# Altium PCB ElvipPCB.PcbDoc (part 1 of 3)
Units mm, origin at the board's own origin, x right, y up, seen from the top; angles counter-clockwise.
Board outline 279.53 x 216.03 mm, 2 copper layers (Top Layer, Bottom Layer), stack 2.071 mm thick; 97 components, 303 nets, 932 pads, 720 vias.
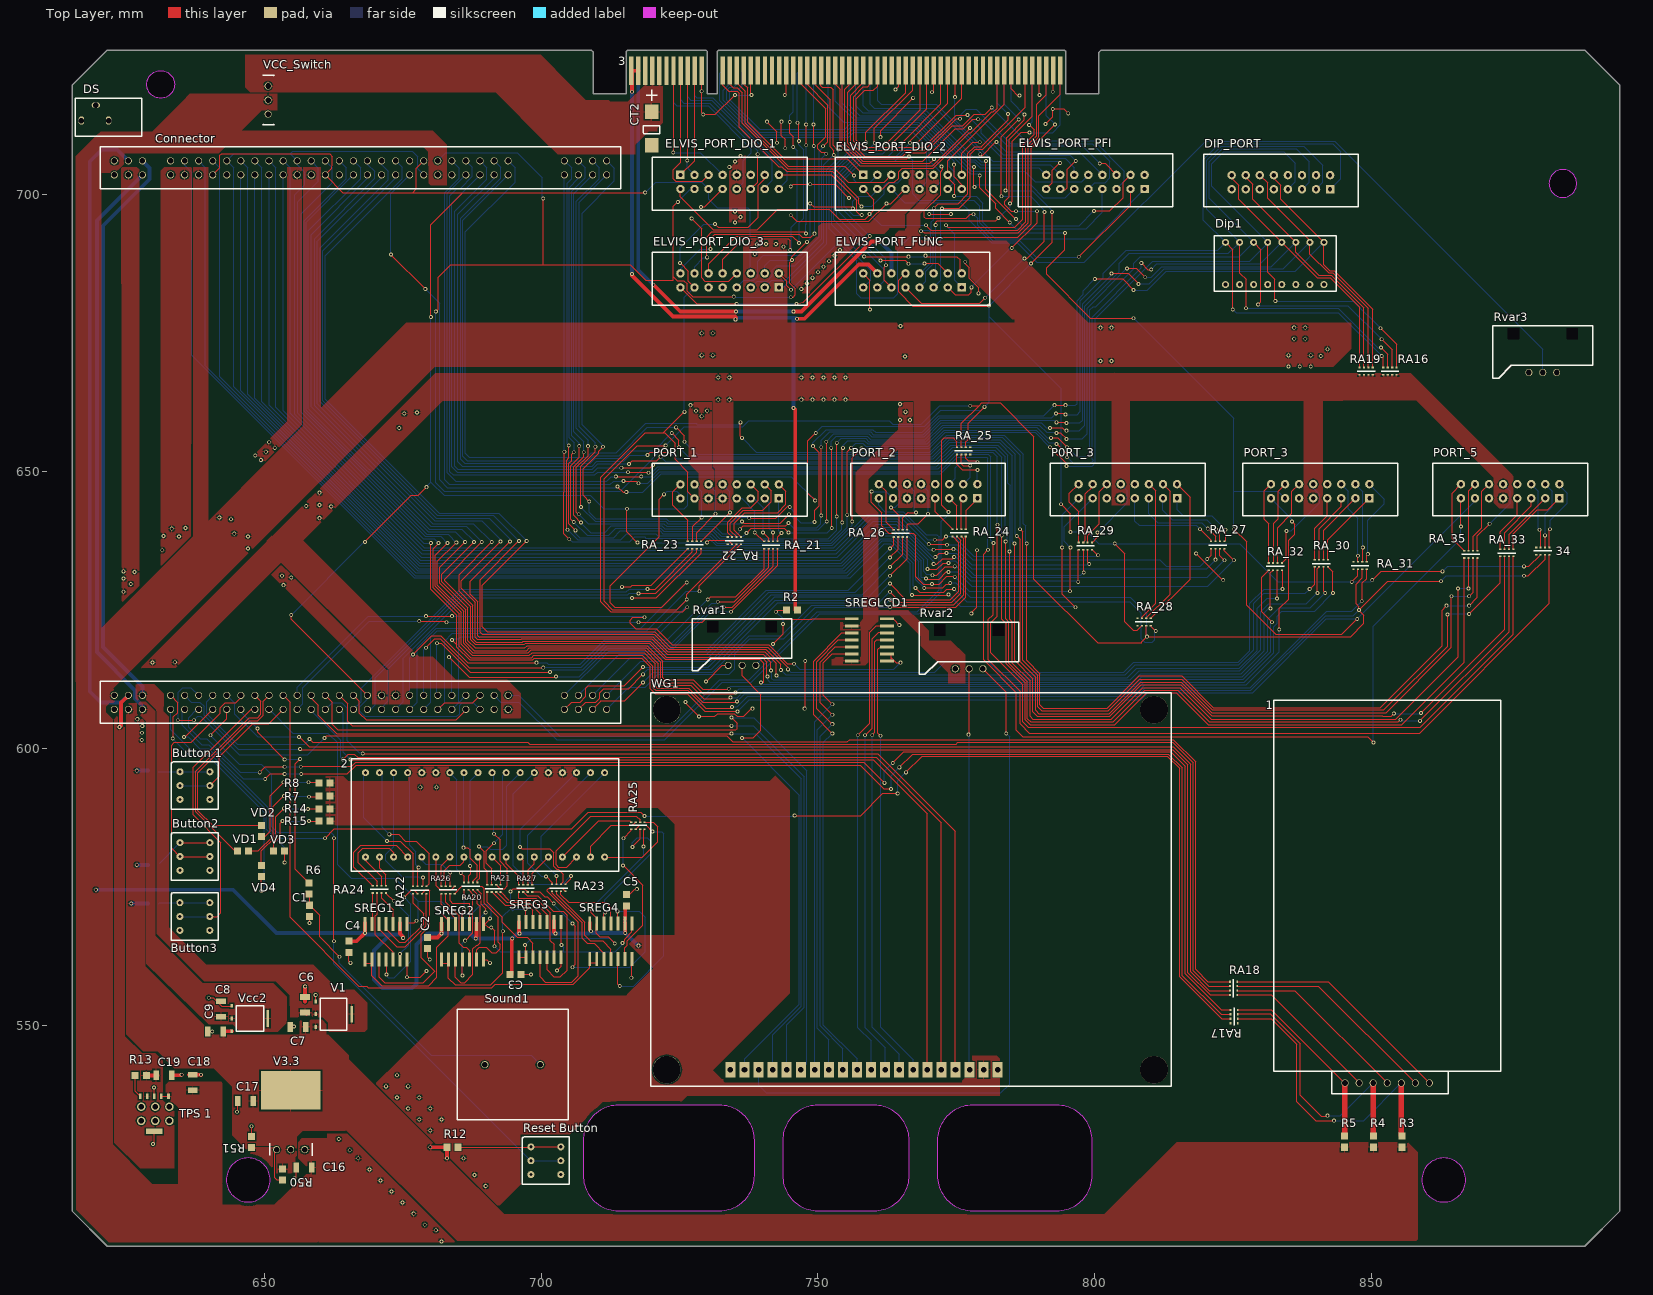
[diagram p0: Top Layer view]
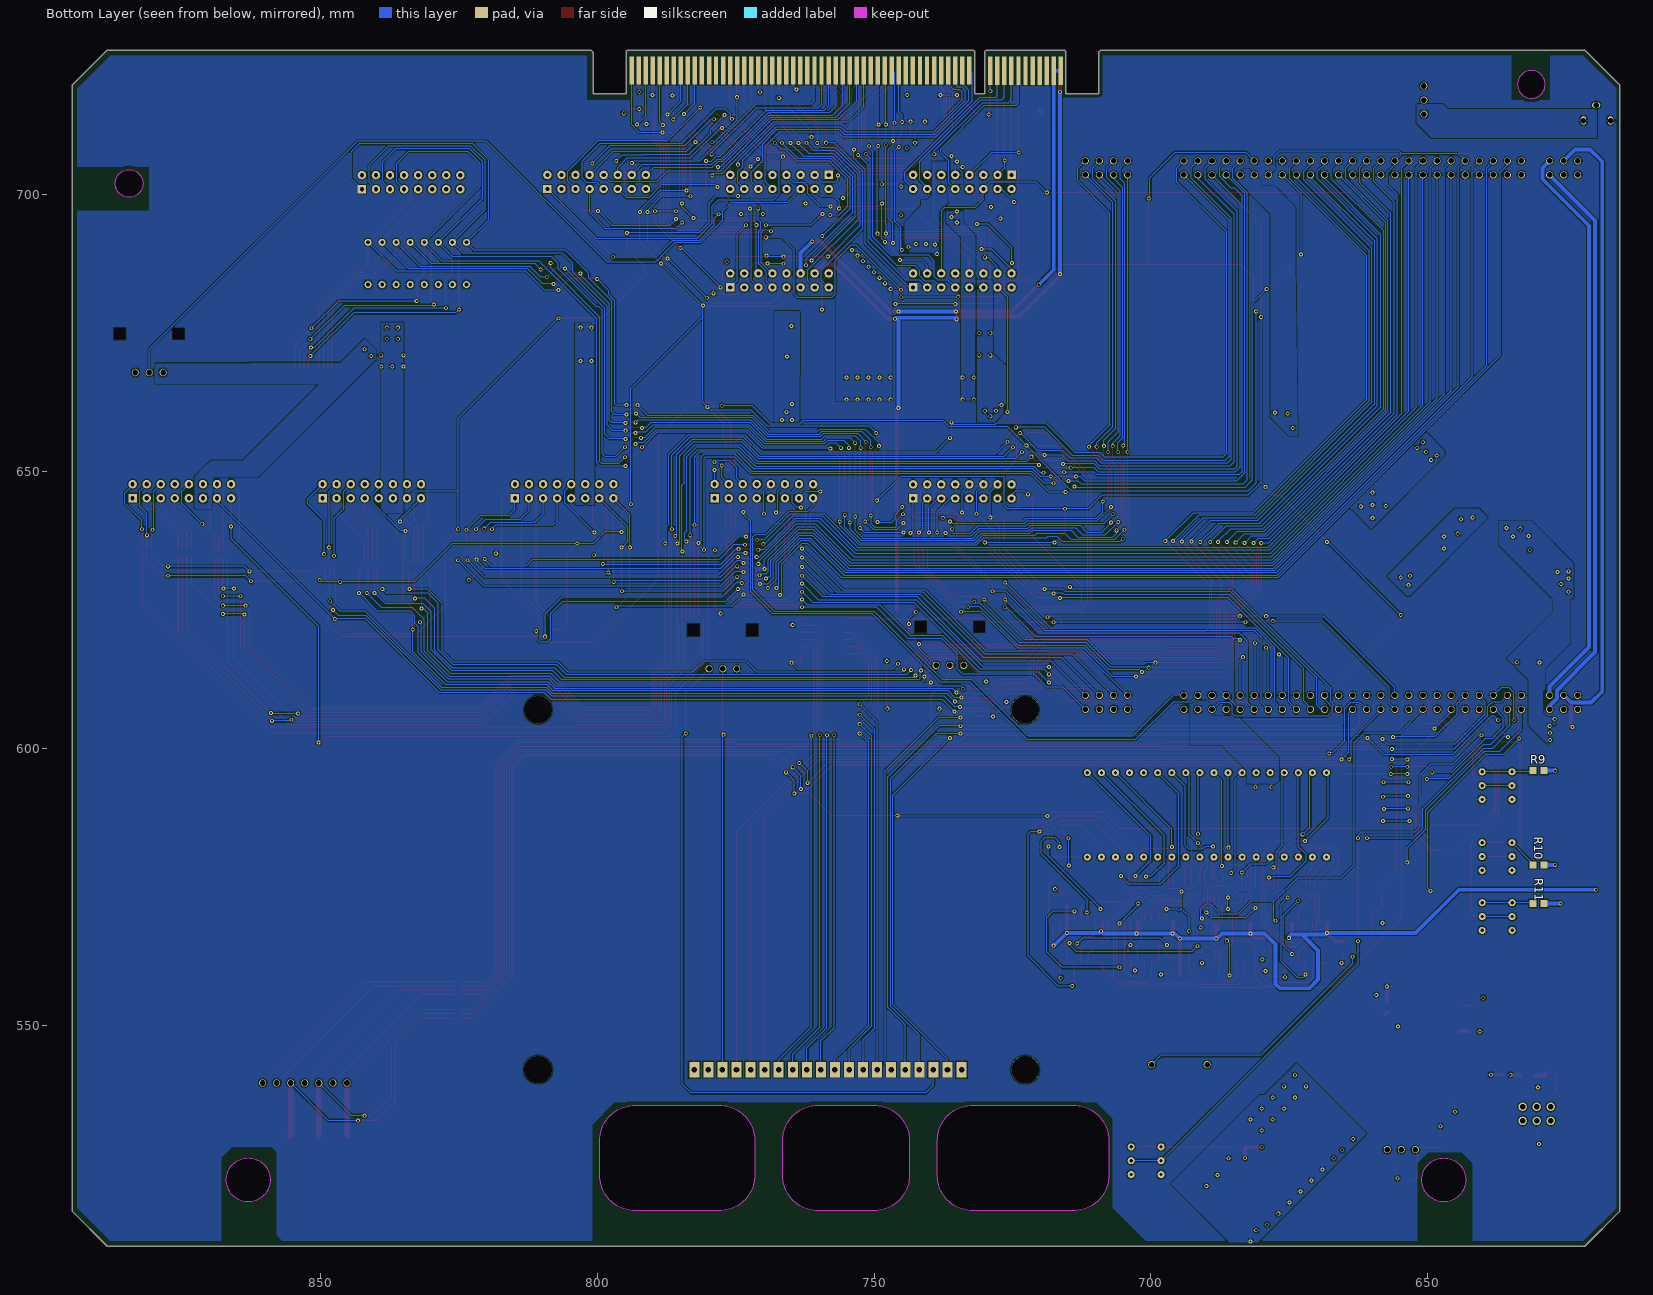
[diagram p1: Bottom Layer view, seen from below]

## Layer stack, top to bottom
Top Solder: solder mask 0.0102, Solder Resist, Dk 3.5
Top Layer: signal copper 0.0356
Dielectric1: core 2, FR-4, Dk 4.8
Bottom Layer: signal copper 0.0356
Bottom Solder: solder mask 0.0102, Solder Resist, Dk 3.5

## Board outline
615.322,516.475 cw(c615.367,516.52) 615.303,516.52 615.303,719.72 cw(c615.367,719.72) 615.322,719.765 621.672,726.115 cw(c621.717,726.07) 621.717,726.134 709.03,726.134 cw(c709.03,726.07) 709.075,726.115 709.393,725.798 cw(c709.347,725.753) 709.411,725.753 709.411,718.264 715.384,718.264 715.384,725.8 cw(c715.447,725.8) 715.402,725.845 715.672,726.115 cw(c715.717,726.07) 715.717,726.134 729.717,726.134 cw(c729.717,726.07) 729.763,726.115 730.033,725.845 cw(c729.987,725.8) 730.051,725.8 730.051,718.264 731.824,718.264 731.824,725.857 cw(c731.887,725.857) 731.842,725.903 732.055,726.115 cw(c732.1,726.07) 732.1,726.134 794.5,726.134 cw(c794.5,726.07) 794.545,726.115 794.733,725.928 cw(c794.687,725.883) 794.751,725.883 794.751,718.264 800.724,718.264 800.724,725.687 cw(c800.787,725.687) 800.742,725.733 801.125,726.115 cw(c801.17,726.07) 801.17,726.134 888.418,726.134 cw(c888.418,726.07) 888.463,726.115 894.813,719.765 cw(c894.768,719.72) 894.831,719.72 894.831,516.52 cw(c894.768,516.52) 894.813,516.475 888.463,510.125 cw(c888.418,510.17) 888.418,510.106 621.717,510.106 cw(c621.717,510.17) 621.672,510.125
cut-out: 631.308,717.426 cw(c631.308,719.926) 628.808,719.926 cw(c631.308,719.926) 631.308,722.426 cw(c631.308,719.926) 633.808,719.926 cw(c631.308,719.926)
cut-out: 882.015,702.037 ccw(c884.515,702.037) 884.515,699.537 ccw(c884.515,702.037) 887.015,702.037 ccw(c884.515,702.037) 884.515,704.537 ccw(c884.515,702.037)
cut-out: 713.965,516.537 732.205,516.537 ccw(c732.205,522.887) 738.555,522.887 738.555,529.237 ccw(c732.205,529.237) 732.205,535.587 713.965,535.587 ccw(c713.965,529.237) 707.615,529.237 707.615,522.887 ccw(c713.965,522.887)
cut-out: 743.635,522.887 ccw(c749.985,522.887) 749.985,516.537 760.145,516.537 ccw(c760.145,522.887) 766.495,522.887 766.495,529.237 ccw(c760.145,529.237) 760.145,535.587 749.985,535.587 ccw(c749.985,529.237) 743.635,529.237
cut-out: 771.575,522.887 ccw(c777.925,522.887) 777.925,516.537 793.165,516.537 ccw(c793.165,522.887) 799.515,522.887 799.515,529.237 ccw(c793.165,529.237) 793.165,535.587 777.925,535.587 ccw(c777.925,529.237) 771.575,529.237
cut-out: 859.055,522.097 ccw(c863.015,522.097) 863.015,518.137 ccw(c863.015,522.097) 866.975,522.097 ccw(c863.015,522.097) 863.015,526.057 ccw(c863.015,522.097)
cut-out: 643.155,522.097 ccw(c647.115,522.097) 647.115,518.137 ccw(c647.115,522.097) 651.075,522.097 ccw(c647.115,522.097) 647.115,526.057 ccw(c647.115,522.097)

## Design rules (kind name [scope] priority, off if disabled: settings)
BoardOutlineClearance [All] p1: gap=0.7 ignorepadtopadclearanceinfootprint=FALSE
Clearance [All] p1: gap=0.2 ignorepadtopadclearanceinfootprint=FALSE except(0: Arc-Hole Track-Hole SMDPad-Hole THPad-Hole Via-Hole Fill-Hole Poly-Hole Region-Hole Text-Hole)
ComponentClearance ComponentClearance_1 [HasFootprint('Connect') vs InComponent('Connector')] p1: gap=0 collisioncheckmode=3 verticalgap=0 showdistances=FALSE
ComponentClearance [All] p2: gap=0.254 collisioncheckmode=3 verticalgap=0.254 showdistances=FALSE
HoleSize [All] p1: absolutevalues=TRUE maxlimit=5.1 minlimit=0.3 maxpercent=80.000 minpercent=20.000
MinimumSolderMaskSliver [All] p1: minsoldermaskwidth=0.15
PasteMaskExpansion [All] p1: expansion=0.2
PlaneClearance [All] p1: clearance=0.2
PolygonConnect [All] p1: connectstyle=Relief reliefconductorwidth=0.254 reliefentries=4 polygonreliefangle="90 Angle" airgapwidth=0.254
RoomDefinition MainConnector [InComponentClass('MainConnector')] p1: confinementstyle=ConfineOut formatcopy=TRUE lockcomponents=FALSE outline 756.2,860.3 851.45,860.3 851.45,968.25 756.2,968.25
RoomDefinition 7SEG-2 [InComponentClass('7SEG-2')] p2: confinementstyle=ConfineOut formatcopy=TRUE lockcomponents=FALSE outline 1023.2,518 1074,518 1074,543.4 1023.2,543.4
RoomDefinition "Power Supplies" [InComponentClass('Power Supplies')] p3: confinementstyle=ConfineOut formatcopy=TRUE lockcomponents=FALSE outline 696.135,852.17 788.035,852.17 788.035,862.97 696.135,862.97
RoomDefinition ELVIS [InComponentClass('ELVIS')] p4: confinementstyle=ConfineOut formatcopy=TRUE lockcomponents=FALSE outline 739.4,878.9 800.2,878.9 800.2,958.1 739.4,958.1
RoomDefinition ELSE_Perif [InComponentClass('ELSE_Perif')] p5: confinementstyle=ConfineOut formatcopy=TRUE lockcomponents=FALSE outline 506.095,826.77 847.09,826.77 847.09,1054.755 506.095,1054.755
RoomDefinition Ports_2 [InComponentClass('Ports_2')] p6: confinementstyle=ConfineOut formatcopy=TRUE lockcomponents=FALSE outline 426,839.001 1320.398,839.001 1320.398,1489.2 426,1489.2
RoutingVias [All] p1: holewidth=0.4 width=0.7 viastyle="Through Hole" minholewidth=0.4 minwidth=0.7 maxholewidth=0.4 maxwidth=0.7
SilkToSolderMaskClearance SilkscreenOverComponentPads [IsPad] p1: minsilkscreentomaskgap=0.254 clearancetoexposedcopper=TRUE
SolderMaskExpansion [All] p1: expansion=0.2
Width Width_1 [InNet('VCC5')] p1: maxlimit=1 minlimit=0.2 preferedwidth=0.7
Width [All] p2: maxlimit=1 minlimit=0.2 preferedwidth=0.7
24 further rules are at their usual default settings.

## Classes and differential pairs
component class 7SEG-2: 2 C2 C3 C4 C5 RA20 RA21 RA22 RA23 RA24 RA25 RA26 RA27 SREG1 SREG2 SREG3 SREG4
component class ELSE_Perif: 1 Button2 Button3 "Button 1" C1 Dip1 DIP_PORT R2 R3 R4 R5 R6 R7 R8 R9 R10 R11 R12 R14 R15 RA16 RA17 RA18 RA19 "Reset Button" Rvar1 Rvar2 Rvar3 Sound1 SREGLCD1 VD1 VD2 VD3 VD4 WG1
component class ELVIS: 3 CT2 ELVIS_PORT_DIO_1 ELVIS_PORT_DIO_2 ELVIS_PORT_DIO_3 ELVIS_PORT_FUNC ELVIS_PORT_PFI VCC_Switch
component class "Power Supplies": C6 C7 C8 C9 C16 C17 C18 C19 DS R13 R50 R51 "TPS 1" V1 V3.3 Vcc2
component class Ports_2: 34 P0RT_3 PORT_1 PORT_2 PORT_3 PORT_5 RA_21 RA_22 RA_23 RA_24 RA_25 RA_26 RA_27 RA_28 RA_29 RA_30 RA_31 RA_32 RA_33 RA_35
component class MainConnector: Connector

## Components (designator, comment, footprint, x,y, rotation, side; value= is the part's Value field where it differs from the comment)
1 "AK-207" AK-207 852.8,577.7 r0 top
2 "CA56-11EWA" CA56-11EWA 668.3,580.4 r0 top
3 "PCI" PCI-120 716.3,722.6 r0 top
34 "Bourns CAT16-102J4LF_1" CAT16-102J4LF_2 880.9,636.3 r0 top
Button2 "ps850l" ps850l 637.5,580.5 r90 top
Button3 "ps850l" ps850l 637.48,569.66 r90 top
"Button 1" "ps850l" ps850l 637.5,593.3 r90 top
C1 "CAPACITY" R0805 658.2,569.7 r90 top
C2 "CAPACITY" R0805 679.5,563.9 r90 top
C3 "CAPACITY" R0805 696.4,559.2 r180 top
C4 "CAPACITY" R0805 665.3,563.2 r90 top
C5 "CAPACITY" R0805 715.4,573.6 r270 top
C6 "CAPACITY" 1206 657.4,552.33 r90 top
C7 "CAPACITY" 1206 657.5,549.73 r180 top
C8 "CAPACITY" 1206 642.233,551.587 r90 top
C9 "CAPACITY" 1206 642.62,548.9 r180 top
C16 "CAPACITY" 1206 658.56,524.32 r180 top
C17 "CAPACITY" 1206 648.01,536.36 r180 top
C18 "CAPACITY" 1206 637.1,538.3 r90 top
C19 "CAPACITY" 1206 633.3,541 r180 top
Connector "Connector" Connect 711.835,706.12 r0 top
CT2 "TECAP, 100 мкФ" "tantal cap" 719.97,708.96 r0 top
Dip1 "DIP" SWD1-8 823.6,687.6 r0 top
DIP_PORT "Вилка_16" DS1013-16 833.6,701 r180 top
DS "DS-313a" ds-313 627.9,713.4 r180 top
ELVIS_PORT_DIO_1 "Вилка_16" DS1013-16 734.06,703.58 r0 top
ELVIS_PORT_DIO_2 "Вилка_16" DS1013-16 767.08,703.58 r0 top
ELVIS_PORT_DIO_3 "Вилка_16" DS1013-16 734.06,683.26 r180 top
ELVIS_PORT_FUNC "Вилка_16" DS1013-16 767.08,683.26 r180 top
ELVIS_PORT_PFI "Вилка_16" DS1013-16 800.1,701.04 r180 top
P0RT_3 "Вилка_16" DS1013-16 805.96,645.2 r180 top
PORT_1 "Вилка_16" DS1013-16 734.06,645.16 r180 top
PORT_2 "Вилка_16" DS1013-16 769.9,645.2 r180 top
PORT_3 "Вилка_16" DS1013-16 840.7,645.2 r180 top
PORT_5 "Вилка_16" DS1013-16 875,645.2 r180 top
R2 "R0805" R0805 744.3,625 r0 top
R3 "R0805" R0805 855.5,528 r90 top
R4 "R0805" R0805 850.3,528 r90 top
R5 "R0805" R0805 845.1,528 r90 top
R6 "R0805" R0805 658.1,575.7 r270 top
R7 "R0805" R0805 659.9,591.4 r0 top
R8 "R0805" R0805 659.9,593.8 r0 top
R9 "R0805" R0805 629,596 r0 bottom
R10 "R0805" R0805 629,579 r0 bottom
R11 "R0805" R0805 629,572 r0 bottom
R12 "R0805" R0805 683,528 r0 top
R13 "R0805" R0805 628.71,540.96 r180 top
R14 "R0805" R0805 659.912,589.116 r0 top
R15 "R0805" R0805 659.9,586.9 r0 top
R50 "R0805" R0805 653.34,522.09 r90 top
R51 "R0805" R0805 647.74,529.95 r270 top
RA16 "Bourns CAT16-102J4LF_1" CAT16-102J4LF_2 853.3,667.5 r180 top
RA17 "Bourns CAT16-102J4LF_1" CAT16-102J4LF_2 825.8,551.6 r270 top
RA18 "Bourns CAT16-102J4LF" CAT16-102J4LF 824.4,556.7 r90 top
RA19 "Bourns CAT16-102J4LF_1" CAT16-102J4LF_2 849,667.5 r180 top
RA20 "Bourns CAT16-102J4LF_1" CAT16-102J4LF_2 687.3,574.5 r180 top
RA21 "Bourns CAT16-102J4LF_1" CAT16-102J4LF_2 691.5,574.1 r180 top
RA22 "Bourns CAT16-102J4LF_1" CAT16-102J4LF_2 678.1,573.8 r180 top
RA23 "Bourns CAT16-102J4LF_1" CAT16-102J4LF_2 703.2,574.2 r180 top
RA24 "Bourns CAT16-102J4LF_1" CAT16-102J4LF_2 670.8,575.2 r0 top
RA25 "Bourns CAT16-102J4LF_1" CAT16-102J4LF_2 717.5,586.7 r0 top
RA26 "Bourns CAT16-102J4LF_1" CAT16-102J4LF_2 683.2,575.1 r0 top
RA27 "Bourns CAT16-102J4LF_1" CAT16-102J4LF_2 697.2,575.4 r0 top
RA_21 "Bourns CAT16-102J4LF_1" CAT16-102J4LF_2 741.5,636.1 r180 top
RA_22 "Bourns CAT16-102J4LF_1" CAT16-102J4LF_2 734.9,636.9 r180 top
RA_23 "Bourns CAT16-102J4LF_1" CAT16-102J4LF_2 727.7,637.4 r0 top
RA_24 "Bourns CAT16-102J4LF_1" CAT16-102J4LF_2 775.5,639.6 r0 top
RA_25 "Bourns CAT16-102J4LF_1" CAT16-102J4LF_2 776.3,654.4 r0 top
RA_26 "Bourns CAT16-102J4LF_1" CAT16-102J4LF_2 764.9,639.5 r0 top
RA_27 "Bourns CAT16-102J4LF_1" CAT16-102J4LF_2 822.2,636.1 r180 top
RA_28 "Bourns CAT16-102J4LF_1" CAT16-102J4LF_2 808.9,623.5 r0 top
RA_29 "Bourns CAT16-102J4LF_1" CAT16-102J4LF_2 798.3,637.2 r0 top
RA_30 "Bourns CAT16-102J4LF_1" CAT16-102J4LF_2 840.9,632.8 r180 top
RA_31 "Bourns CAT16-102J4LF_1" CAT16-102J4LF_2 847.9,632.4 r180 top
RA_32 "Bourns CAT16-102J4LF_1" CAT16-102J4LF_2 832.6,633.5 r0 top
RA_33 "Bourns CAT16-102J4LF_1" CAT16-102J4LF_2 874.4,634.7 r180 top
RA_35 "Bourns CAT16-102J4LF_1" CAT16-102J4LF_2 867.9,635.7 r0 top
"Reset Button" "ps850l" ps850l 700.87,525.57 r90 top
Rvar1 "R-0904N-A10K, L20KC" "R-0904N-A10K, L20KC" 736.3,615 r0 top
Rvar2 "R-0904N-A10K, L20KC" "R-0904N-A10K, L20KC" 777.3,614.4 r0 top
Rvar3 "R-0904N-A10K, L20KC" "R-0904N-A10K, L20KC" 880.9,667.9 r0 top
Sound1 "SCS-17-P10" SCS-17-P10 689.87,542.93 r0 top
SREG1 "M74HC595B1R" SN74HC164DRX 668.2,561.2 r0 top
SREG2 "M74HC595B1R" SN74HC164DRX 682,561.2 r0 top
SREG3 "M74HC595B1R" SN74HC164DRX 696,561.6 r0 top
SREG4 "M74HC595B1R" SN74HC164DRX 708.8,561.3 r0 top
SREGLCD1 "M74HC595B1R" SN74HC164DRX 763.2,615.8 r90 top
"TPS 1" "TPS72515DCQ -1v" SOT223-5 632.7,537.2 r180 top
V1 "IRU1010-18" IRU1010-18 659.3,552.03 r270 top
V3.3 "LM1085" LM1085 652.25,527.58 r0 top
Vcc2 "ADP3338AKCZ-2.5RL7" sot223 644.16,551.24 r270 top
VCC_Switch "switch" К(Р)142ЕН5В 650.7,717.1 r270 top
VD1 "R0805" R0805 645.2,581.5 r0 top
VD2 "R0805" R0805 649.5,586.1 r270 top
VD3 "R0805" R0805 653.7,581.5 r180 top
VD4 "R0805" R0805 649.5,576.9 r90 top
WG1 "MT6464b" WG12864A 722.7,542 r0 top

## Footprints (in the part's own frame and the unit in brackets; to place one, negate y for a bottom-side part, rotate by r counter-clockwise, add the part's x,y. Pads: shape width x height; smd on the part's side, far side on the other; paste and mask are expansions set on the pad)
1206 [mm]
  rect 1x1.8 smd mask+0.05: 1(0,0) 2(2.8,0)
AK-207 [mm]
  round 1.27 / inner round 1.524 / far side round 1.27 hole 1: 1(-7.62,-38.1) 2(-5.08,-38.1) 3(-2.54,-38.1) 4(0,-38.1) 5(2.54,-38.1) 6(5.08,-38.1) 7(7.62,-38.1)
  silkscreen extent -20.5,-40 20.5,31
CA56-11EWA [mm]
  round 1.27 / inner rect 0.8x2.54 / far side round 1.27 hole 0.6: 1(0,0) 2(2.54,0) 3(5.08,0) 4(7.62,0) 5(10.16,0) 6(12.7,0) 7(15.24,0) 8(17.78,0) 9(20.32,0) 10(22.86,0) 11(25.4,0) 12(27.94,0) 13(30.48,0) 14(33.02,0) 15(35.56,0) 16(38.1,0) 17(40.64,0) 18(43.18,0) 19(43.18,15.24) 20(40.64,15.24) 21(38.1,15.24) 22(35.56,15.24) 23(33.02,15.24) 24(30.48,15.24) 25(27.94,15.24) 26(25.4,15.24) 27(22.86,15.24) 28(20.32,15.24) 29(17.78,15.24) 30(15.24,15.24) 31(12.7,15.24) 32(10.16,15.24) 33(7.62,15.24) 34(5.08,15.24) 35(2.54,15.24) 36(0,15.24)
  silkscreen extent -2.54,-2.54 45.72,17.78
CAT16-102J4LF [mm]
  rect 0.4x0.3 smd mask+0.05: 0(-1.2,-1.3) 1(-0.4,-1.3) 2(0.4,-1.3) 3(1.2,-1.3) 4(-1.2,0) 5(-0.4,0) 6(0.4,0) 7(1.2,0)
  silkscreen extent -1.6,-0.6 1.6,-0.6
CAT16-102J4LF_2 [mm]
  rect 0.4x0.3 smd mask+0.05: 0(1.2,-1.3) 1(0.4,-1.3) 2(-0.4,-1.3) 3(-1.2,-1.3) 4(-1.2,0) 5(-0.4,0) 6(0.4,0) 7(1.2,0)
  silkscreen extent -1.6,-0.6 1.6,-0.6
Connect [mm]
  round 1.27 / inner rect 0.8x2.54 / far side round 1.27 hole 1: 1(-88.9,0) 2(-86.36,0) 3(-83.82,0) 4(-78.74,0) 5(-76.2,0) 6(-73.66,0) 7(-71.12,0) 8(-68.58,0) 9(-66.04,0) 10(-63.5,0) 11(-60.96,0) 12(-58.42,0) 13(-55.88,0) 14(-53.34,0) 15(-50.8,0) 16(-48.26,0) 17(-45.72,0) 18(-43.18,0) 19(-40.64,0) 20(-38.1,0) 21(-35.56,0) 22(-33.02,0) 23(-30.48,0) 24(-27.94,0) 25(-25.4,0) 26(-22.86,0) 27(-20.32,0) 28(-17.78,0) 29(-7.62,0) 30(-5.08,0) 31(-2.54,0) 32(0,0) 33(0,-2.54) 34(-2.54,-2.54) 35(-5.08,-2.54) 36(-7.62,-2.54) 37(-17.78,-2.54) 38(-20.32,-2.54) 39(-22.86,-2.54) 40(-25.4,-2.54) 41(-27.94,-2.54) 42(-30.48,-2.54) 43(-33.02,-2.54) 44(-35.56,-2.54) 45(-38.1,-2.54) 46(-40.64,-2.54) 47(-43.18,-2.54) 48(-45.72,-2.54) 49(-48.26,-2.54) 50(-50.8,-2.54) 51(-53.34,-2.54) 52(-55.88,-2.54) 53(-58.42,-2.54) 54(-60.96,-2.54) 55(-63.5,-2.54) 56(-66.04,-2.54) 57(-68.58,-2.54) 58(-71.12,-2.54) 59(-73.66,-2.54) 60(-76.2,-2.54) 61(-78.74,-2.54) 62(-83.82,-2.54) 63(-86.36,-2.54) 64(-88.9,-2.54) 65(-88.9,-96.52) 66(-86.36,-96.52) 67(-83.82,-96.52) 68(-78.74,-96.52) 69(-76.2,-96.52) 70(-73.66,-96.52) 71(-71.12,-96.52) 72(-68.58,-96.52) 73(-66.04,-96.52) 74(-63.5,-96.52) 75(-60.96,-96.52) 76(-58.42,-96.52) 77(-55.88,-96.52) 78(-53.34,-96.52) 79(-50.8,-96.52) 80(-48.26,-96.52) 81(-45.72,-96.52) 82(-43.18,-96.52) 83(-40.64,-96.52) 84(-38.1,-96.52) 85(-35.56,-96.52) 86(-33.02,-96.52) 87(-30.48,-96.52) 88(-27.94,-96.52) 89(-25.4,-96.52) 90(-22.86,-96.52) 91(-20.32,-96.52) 92(-17.78,-96.52) 93(-7.62,-96.52) 94(-5.08,-96.52) 95(-2.54,-96.52) 96(0,-96.52) 97(0,-99.06) 98(-2.54,-99.06) 99(-5.08,-99.06) 100(-7.62,-99.06) 101(-17.78,-99.06) 102(-20.32,-99.06) 103(-22.86,-99.06) 104(-25.4,-99.06) 105(-27.94,-99.06) 106(-30.48,-99.06) 107(-33.02,-99.06) 108(-35.56,-99.06) 109(-38.1,-99.06) 110(-40.64,-99.06) 111(-43.18,-99.06) 112(-45.72,-99.06) 113(-48.26,-99.06) 114(-50.8,-99.06) 115(-53.34,-99.06) 116(-55.88,-99.06) 117(-58.42,-99.06) 118(-60.96,-99.06) 119(-63.5,-99.06) 120(-66.04,-99.06) 121(-68.58,-99.06) 122(-71.12,-99.06) 123(-73.66,-99.06) 124(-76.2,-99.06) 125(-78.74,-99.06) 126(-83.82,-99.06) 127(-86.36,-99.06) 128(-88.9,-99.06)
  silkscreen extent -91.44,-101.6 2.54,2.54
DS1013-16 [mil]
  rect 60x60 hole 30: 0(-350,0)
  round 60 hole 30: 1(-250,0) 2(-150,0) 3(-50,0) 4(50,0) 5(150,0) 6(250,0) 7(350,0) 8(350,-100) 9(250,-100) 10(150,-100) 11(50,-100) 12(-50,-100) 13(-150,-100) 14(-250,-100) 15(-350,-100)
  silkscreen extent -550,-250 550,125
ds-313 [mm]
  oval 1x1.5 / inner round 1.524 / far side oval 1x1.5 hole 1: 1(6,0) 2(10.9,0)
  oval 1.5x1 / inner round 1.524 / far side oval 1.5x1 hole 1: 3(8.3,-2.8)
  silkscreen extent 0,-4 12,2.8
IRU1010-18 [mm]
  rect 0.7x0.5 smd mask+0.05: 0(-2.3,0) 1(0,0) 2(2.3,0)
  rect 3x0.5 smd mask+0.05: 3(0,6.5)
  silkscreen extent -2.9,0.8 2.9,5.6
LM1085 [mm]
  round 1.27 / inner oval 0.4x0.3 / far side round 1.27 hole 1 mask+0.05: 0(0,0) 1(2.54,0) 2(5.08,0)
  rect 10.8x7 smd mask+0.05: 1(2.54,10.7)
  silkscreen extent -1.2,-1.1 6.4,1.14
PCI-120 [mm]
  rect 0.8x5.08 smd mask+0.05: 0(0,-0.2) 1(1.27,-0.2) 2(2.54,-0.2) 3(3.81,-0.2) 4(5.08,-0.2) 5(6.35,-0.2) 6(7.62,-0.2) 7(8.89,-0.2) 8(10.16,-0.2) 9(11.43,-0.2) 10(12.7,-0.2) 11(16.52,-0.14) 12(17.79,-0.14) 13(19.06,-0.14) 14(20.33,-0.14) 15(21.6,-0.14) 16(22.87,-0.14) 17(24.14,-0.14) 18(25.41,-0.14) 19(26.68,-0.14) 20(27.95,-0.14) 21(29.22,-0.14) 22(31.76,-0.14) 23(30.49,-0.14) 24(33.03,-0.14) 25(34.3,-0.14) 26(35.57,-0.14) 27(36.84,-0.14) 28(38.11,-0.14) 29(39.38,-0.14) 30(40.65,-0.14) 31(41.92,-0.14) 32(43.19,-0.14) 33(44.46,-0.14) 34(45.73,-0.14) 35(47,-0.14) 36(48.27,-0.14) 37(49.54,-0.14) 38(50.81,-0.14) 39(52.08,-0.14) 40(53.35,-0.14) 41(54.62,-0.14) 42(55.89,-0.14) 43(57.16,-0.14) 44(58.43,-0.14) 45(59.7,-0.14) 46(60.97,-0.14) 47(62.24,-0.14) 48(64.78,-0.14) 49(66.05,-0.14) 50(67.32,-0.14) 51(68.59,-0.14) 52(69.86,-0.14) 53(71.13,-0.14) 54(72.4,-0.14) 55(73.67,-0.14) 56(74.94,-0.14) 57(76.21,-0.14) 58(77.48,-0.14) 118(63.51,-0.14)
  rect 0.8x5.08 smd far side mask+0.05: 59(77.48,-0.14) 60(76.21,-0.14) 61(74.94,-0.14) 62(73.67,-0.14) 63(72.4,-0.14) 64(71.13,-0.14) 65(69.86,-0.14) 66(68.59,-0.14) 67(67.32,-0.14) 68(66.05,-0.14) 69(64.78,-0.14) 70(62.24,-0.14) 71(60.97,-0.14) 72(59.7,-0.14) 73(58.43,-0.14) 74(57.16,-0.14) 75(55.89,-0.14) 76(54.62,-0.14) 77(53.35,-0.14) 78(52.08,-0.14) 79(50.81,-0.14) 80(49.54,-0.14) 81(48.27,-0.14) 82(47,-0.14) 83(45.73,-0.14) 84(44.46,-0.14) 85(43.19,-0.14) 86(41.92,-0.14) 87(40.65,-0.14) 88(39.38,-0.14) 89(38.11,-0.14) 90(36.84,-0.14) 91(35.57,-0.14) 92(34.3,-0.14) 93(33.03,-0.14) 94(31.76,-0.14) 95(30.49,-0.14) 96(29.22,-0.14) 97(27.95,-0.14) 98(26.68,-0.14) 99(25.41,-0.14) 100(24.14,-0.14) 101(22.87,-0.14) 102(21.6,-0.14) 103(20.33,-0.14) 104(19.06,-0.14) 105(17.79,-0.14) 106(16.52,-0.14) 107(12.7,-0.2) 108(11.43,-0.2) 109(10.16,-0.2) 110(8.89,-0.2) 111(7.62,-0.2) 112(6.35,-0.2) 113(5.08,-0.2) 114(3.81,-0.2) 115(2.54,-0.2) 116(1.27,-0.2) 117(0,-0.2) 119(63.5,-0.14)
ps850l [mm]
  round 1.27 / inner round 1.524 / far side round 1.27 hole 0.6: 1(-2.5,2.7) 2(0,2.7) 3(2.5,2.7) 4(-2.5,-2.7) 5(0,-2.7) 6(2.5,-2.7)
  silkscreen extent -4.28,-4.25 4.28,4.25
R0805 [mm]
  rect 1.27x1.27 smd: 1(0,0) 2(2,0)
"R-0904N-A10K, L20KC" [mm]
  round 1.27 hole 1: 0(-2.5,0) 1(0,0) 2(2.5,0)
  round 1.27 hole 2 square: 3(-5.3,7) 4(5.3,7)
  silkscreen extent -9,-1 9,8.4
SCS-17-P10 [mm]
  round 1.27 / inner oval 0.4x0.3 / far side round 1.27 hole 1 mask+0.05: 0(0,0) 1(10,0)
  silkscreen extent -5,-10 15,10
SN74HC164DRX [mm]
  rect 0.51x2.5 smd mask+0.05: 1(0,0.7) 2(1.27,0.7) 3(2.54,0.7) 4(3.81,0.7) 5(5.08,0.7) 6(6.35,0.7) 7(7.62,0.7) 8(7.62,7.1) 9(6.35,7.1) 10(5.08,7.1) 11(3.81,7.1) 12(2.54,7.1) 13(1.27,7.1) 14(0,7.1)
sot223 [mm]
  rect 0.7x0.5 smd mask+0.05: 0(-2.3,0) 1(0,0) 2(2.3,0)
  rect 3x0.5 smd mask+0.05: 3(0,6.5)
  silkscreen extent -2.3,0.8 2.3,5.8
SOT223-5 [mm]
  rect 0.5x1 smd mask+0.05: 0(0,0) 1(1.27,0) 2(2.54,0) 3(3.81,0) 4(5.08,0)
  rect 3x1 smd mask+0.05: 5(2.54,6.35)
SWD1-8 [mm]
  round 1.27 / inner rect 0.8x2.54 / far side round 1.27 hole 0.65: 1(0,3.81) 2(2.54,3.81) 3(5.08,3.81) 4(7.62,3.81) 5(10.16,3.81) 6(12.7,3.81) 7(15.24,3.81) 8(17.78,3.81) 9(17.78,-3.81) 10(15.24,-3.81) 11(12.7,-3.81) 12(10.16,-3.81) 13(7.62,-3.81) 14(5.08,-3.81) 15(2.54,-3.81) 16(0,-3.81)
  silkscreen extent -2,-5 20,5
"tantal cap" [mm]
  rect 2.4x2.6 smd mask+0.05: 0(0,0) 1(0,6)
  silkscreen extent -1.5,2.1 1.5,10
WG12864A [mm]
  rect 1.8x2.75 hole 1 paste+0: 0(59.76,0)
  rect 1.8x2.75 hole 1: 1(57.22,0) 2(54.68,0) 3(52.14,0) 4(49.6,0) 5(47.06,0) 6(44.52,0) 7(41.98,0) 8(39.44,0) 9(36.9,0) 10(34.36,0) 11(31.82,0) 12(29.28,0) 13(26.74,0) 14(24.2,0) 15(21.66,0) 16(19.12,0) 17(16.58,0) 18(14.04,0) 19(11.5,0)
  round 5 hole 5 unplated: hole(0,65) hole4(0,0)
  round 5 hole 5: hole1(88,65) hole2(88,0)
  silkscreen extent -2.9,-3 91.1,68.1
К(Р)142ЕН5В [mm]
  round 1.27 / inner oval 0.4x0.3 / far side round 1.27 hole 1 mask+0.05: 0(-2.54,0) 1(0,0) 2(2.54,0)
  silkscreen extent -4.5,-1 4.5,1.1

## Part data
DIP_PORT ELVIS_PORT_DIO_1 ELVIS_PORT_DIO_2 ELVIS_PORT_DIO_3 ELVIS_PORT_FUNC ELVIS_PORT_PFI P0RT_3 PORT_1 PORT_2 PORT_3 PORT_5: library part DS1013-16, "16_pin"

## Free pads (board coordinates)
  round 1.524 hole 1 mask+0.05: 0(627.8,535.3) 1(630.34,535.3) 2(632.88,535.3) 3(627.8,532.76) 4(630.34,532.76) 5(632.88,532.76)

## Via types
v1: diameter 0.7, hole 0.4, Top Layer to Bottom Layer, 720 vias

## Nets (pads, with @x,y where several pads share a name; then routed paths per layer and width w, separated by ;. In a path a pad name is that pad's centre, name@x,y a point inside that pad or via, vN(x,y) a via of type N, cw(c..) or ccw(c..) an arc to the next point about the centre after c; other vN are vias at no path point)
7SEG_CLK: Connector.118 SREG1.8 SREG2.8 SREG3.8 SREG4.8 | length 117.9
  Top Layer w0.2: SREG1.8@675.82,568.5 677.1,568.5 v1(677.5,568.9) ; SREG2.8@689.62,568.3 689.8,568.3 SREG2.8@689.81,568.31 ; SREG2.8@689.62,568.5 689.72,568.4 SREG2.8@689.81,568.31 ; v1(690.8,569.3) SREG2.8@689.81,568.31 ; v1(691.6,564.3) 691.6,567.1 v1(691,567.7) 690.42,567.7 SREG2.8@689.81,568.31 ; SREG3.8@703.62,568.7 703.62,564.58 v1(703.7,564.5) ; v1(714.7,564.9) 715.1,565.3 715.1,565.6 716.42,566.92 SREG4.8@716.42,568.4
  Bottom Layer w0.2: Connector.118@650.875,607.06 655.135,602.8 661.5,602.8 663.3,601 663.3,579 665.7,576.6 673.6,576.6 677.8,572.4 ; v1(677.5,568.9) 677.8,569.2 677.8,572.4 ; v1(690.8,569.3) 691,569.5 691,571.1 690.2,571.9 689.2,571.9 687.4,570.1 684.3,570.1 682,572.4 677.8,572.4 ; v1(691.6,564.3) 692.6,563.3 704.1,563.3 ; v1(703.7,564.5) 704.1,564.1 704.1,563.3 ; v1(714.7,564.9) 714.7,564.6 713.4,563.3 704.1,563.3
7SEGM_DATA: Connector.76 SREG4.1 SREG4.2 | length 103.7
  Top Layer w0.2: Connector.76@653.415,609.6 654.7,608.315 654.7,569.5 667.1,557.1 668.5,557.1 668.8,556.8 691.1,556.8 691.7,557.4 705.8,557.4 708.8,560.4 708.8,561.3 SREG4.2@710.07,561.3
AI1: Connector.108 PORT_1.7 | length 109.1
  Top Layer w0.2: v1(722.2,645.9) 721.3,645 721.3,638.2 712.5,629.4 712.5,626.3 713.3,625.5 721.8,625.5 v1(726.3,630)
  Bottom Layer w0.2: Connector.108@676.275,607.06 677.6,608.385 677.6,618.2 681.1,621.7 718,621.7 v1(726.3,630) ; v1(722.2,645.9) 722.8,646.5 724.5,646.5 725.17,645.83 PORT_1.7@725.17,645.16
AI2: Connector.92 PORT_2.7 | length 115.9
  Bottom Layer w0.2: Connector.92@694.055,609.6 696,609.6 703.4,602.2 722.1,602.2 732.3,612.4 737.6,612.4 749.9,624.7 767.9,624.7 771.9,628.7 771.9,638.2 771.5,638.6 769.6,638.6 765.4,642.8 762.1,642.8 761.01,643.89 PORT_2.7@761.01,645.2
AI3: Connector.5 P0RT_3.7 | length 244.4
  Top Layer w0.2: v1(767,627.7) 773.5,627.7 v1(773.6,627.8) ; v1(794.1,636.3) 794.1,627.9 v1(796.5,625.5)
  Bottom Layer w0.2: Connector.5@635.635,706.12 635.635,705.365 636.9,704.1 636.9,671 677.1,630.8 755.8,630.8 762,637 763.1,637 766.7,633.4 766.7,628 v1(767,627.7) ; v1(773.6,627.8) 775.7,625.7 796.3,625.7 v1(796.5,625.5) ; v1(794.1,636.3) 794.1,642.23 P0RT_3.7@797.07,645.2
AI4: Connector.16 PORT_3.7 | length 295.8
  Top Layer w0.2: v1(684.7,637.2) 681.3,633.8 681.3,629.5 686,624.8 686,619 687.7,617.3 697.7,617.3 698.2,617.8 718.7,617.8 721.2,615.3 721.2,611.9 721.7,611.4 727,611.4 729.4,609 734,609 v1(734.2,609.2) ; v1(833.3,621.5) 833.3,625.3 835,627 835,637.6 836.1,638.7 836.1,640.5 v1(835.6,641)
  Bottom Layer w0.2: Connector.16@663.575,706.12 664.8,704.895 664.8,702.9 657.2,695.3 657.2,660.9 679.4,638.7 683.2,638.7 v1(684.7,637.2) ; v1(734.2,609.2) 735.4,609.2 736.6,610.4 807.9,610.4 809,611.5 827.3,611.5 833.3,617.5 v1(833.3,621.5) ; PORT_3.7@831.81,645.2 835.6,641.41 v1(835.6,641)
AI5: Connector.44 PORT_5.7 | length 330.8
  Top Layer w0.2: v1(672.9,689.2) v1(679.1,683) ; v1(713.8,647.3) 714.8,646.3 v1(715.4,646.3) ; v1(780.7,635.9) 779.9,635.1 779.9,616 785.8,610.1 785.8,603.3 787,602.1 849.3,602.1 v1(850.3,601.1) ; v1(866.1,640.1) 866.11,640.11 PORT_5.7@866.11,645.2
  Bottom Layer w0.2: v1(672.9,689.2) 672.9,700.205 Connector.44@676.275,703.58 ; v1(679.1,683) 681.7,680.4 681.7,648.5 683.1,647.1 713.6,647.1 v1(713.8,647.3) ; v1(715.4,646.3) 718.4,646.3 721.7,649.6 772.2,649.6 775.2,652.6 780.5,652.6 780.7,652.4 v1(780.7,635.9) ; v1(850.3,601.1) 850.3,622.1 866.1,637.9 v1(866.1,640.1)
AO1: Connector.107 RA_22.4 | length 77.1
  Top Layer w0.2: v1(728.6,628.4) 728.6,629.4 RA_22.4@736.1,636.9
  Bottom Layer w0.2: Connector.107@678.815,607.06 680.1,608.345 680.1,620.1 681.3,621.3 719.1,621.3 726.2,628.4 v1(728.6,628.4)
AO2: Connector.91 RA_25.4 | length 127.7
  Top Layer w0.2: v1(773.6,642.7) 772.4,643.9 772.4,655.7 772.8,656.1 774.4,656.1 775.1,655.4 RA_25.4@775.1,654.4
  Bottom Layer w0.2: Connector.91@691.515,609.6 692.715,608.4 696,608.4 702.8,601.6 722.3,601.6 732.7,612 738,612 750.3,624.3 768.3,624.3 772.3,628.3 772.3,641 773.5,642.2 773.5,642.6 v1(773.6,642.7)
AO3: Connector.6 RA_28.0 | length 243.6
  Top Layer w0.2: v1(767.6,629) 768.4,628.2 772.7,628.2 773.3,628.8 v1(774.6,628.8) ; RA_28.0@810.1,622.2 810.1,622.1 v1(811,621.2)
  Bottom Layer w0.2: Connector.6@638.175,706.12 639.4,704.895 639.4,669.1 677.3,631.2 755.3,631.2 761.6,637.5 763.2,637.5 767.2,633.5 767.2,629.4 v1(767.6,629) ; v1(774.6,628.8) 776.9,626.5 806.3,626.5 808.4,624.4 808.4,619.8 809,619.2 810.4,619.2 810.8,619.6 810.8,621 v1(811,621.2)
AO4: Connector.15 RA_31.4 | length 289
  Top Layer w0.2: v1(683.1,637.1) 680.9,634.9 680.9,629.3 685.6,624.6 685.6,618.8 687.6,616.8 697.9,616.8 698.4,617.3 718.6,617.3 720.6,615.3 720.6,611.3 721,610.9 726.7,610.9 729.2,608.4 735.3,608.4 v1(735.4,608.5) ; v1(848.2,626.6) 848.3,626.7 848.3,629.9 849.1,630.7 RA_31.4@849.1,632.4
  Bottom Layer w0.2: Connector.15@661.035,706.12 662.3,704.855 662.3,702.2 656.7,696.6 656.7,660.7 679.1,638.3 681.9,638.3 v1(683.1,637.1) ; v1(735.4,608.5) 736.8,609.9 808,609.9 809.1,611 828.1,611 841.9,624.8 846.4,624.8 v1(848.2,626.6)
AO5: 34.0 Connector.24 | length 326.8
  Top Layer w0.2: v1(714.9,648.3) 717.2,648.3 v1(717.6,647.9) ; v1(781.7,637.1) 781.7,624.2 780.8,623.3 780.8,616 786.5,610.3 786.5,604.5 788.2,602.8 858.7,602.8 882.1,626.2 34.0@882.1,635
  Bottom Layer w0.2: Connector.24@683.895,706.12 685.2,704.815 685.2,703 682.6,700.4 682.6,648.5 683.4,647.7 712.5,647.7 713.1,648.3 v1(714.9,648.3) ; v1(717.6,647.9) 719.3,647.9 721.4,650 772,650 775.1,653.1 780.8,653.1 781.2,652.7 781.2,637.6 v1(781.7,637.1)
BUTTON_1_OUT: "Button 1.2" "Button 1.5" Connector.117 | length 26.4
  Top Layer w0.2: 640.2,593.3 641.9,595 641.9,598.5 647.9,604.5 650.855,604.5 Connector.117@653.415,607.06
  Bottom Layer w0.2: 634.8,593.3 640.2,593.3
BUTTON_2_OUT: Button2.2 Button2.5 Connector.73 | length 43.2
  Top Layer w0.2: Button2.5@640.2,580.5 Button2.2@634.8,580.5 633.32,581.98 633.32,600.62 633.8,601.1 636.8,601.1 642.1,606.4 642.1,607.4 642.9,608.2 643,608.3 644.9,608.3 645.795,609.195 Connector.73@645.795,609.6
BUTTON_3_OUT: Button3.2 Button3.5 Connector.119 | length 51.5
  Top Layer w0.2: Button3.5@640.18,569.66 641.56,569.66 642.2,570.3 642.2,583 637.2,588 637.2,596.6 647.66,607.06 Connector.119@648.335,607.06
  Bottom Layer w0.2: Button3.2@634.78,569.66 Button3.5@640.18,569.66
BUTTON_RESET_OUT: "Reset Button.2" "Reset Button.5" Connector.121 | length 120.1
  Top Layer w0.2: v1(640.3,602.4) 643.255,605.355 Connector.121@643.255,607.06 ; v1(662.6,565.2) v1(662.6,583.8)
  Bottom Layer w0.2: v1(640.3,602.4) 645.5,597.2 649.5,597.2 651.4,595.3 651.4,585.9 652.4,584.9 662,584.9 662.6,584.3 v1(662.6,583.8) ; v1(662.6,565.2) 662.6,561.14 698.17,525.57 703.57,525.57
DIP_OUT_0: Connector.33 Dip1.1 DIP_PORT.0 RA16.0 | length 323.3
  Top Layer w0.2: v1(707.2,643.6) 707.2,651 709.8,653.6 v1(709.8,654.5) ; v1(736.3,641) 736.6,640.7 743.2,640.7 v1(744.8,642.3) ; v1(750.6,642.1) v1(750.6,654.4) ; v1(793,660.5) 794.5,660.5 v1(794.7,660.3) ; Dip1.1@823.6,691.41 824.9,690.11 v1(824.9,679.3) ; v1(851.8,670.9) 852.1,670.6 RA16.0@852.1,668.8
  Bottom Layer w0.2: v1(707.2,643.6) 709.8,641 722.5,641 722.9,640.6 735.9,640.6 v1(736.3,641) ; v1(709.8,654.5) 709.8,655.2 706.9,658.1 706.9,698.645 Connector.33@711.835,703.58 ; v1(744.8,642.3) 745.9,641.2 745.9,640.2 746.2,639.9 749.8,639.9 750.5,640.6 750.5,642 v1(750.6,642.1) ; v1(750.6,654.4) 750.6,655.7 752.1,657.2 759.5,657.2 760,656.7 769,656.7 772,659.7 792.2,659.7 v1(793,660.5) ; v1(794.7,660.3) 796.8,660.3 797.4,660.9 797.4,680.9 801.5,685 801.5,685.8 805.7,690 822.19,690 Dip1.1@823.6,691.41 819.6,695.41 819.6,706.3 822.5,709.2 843,709.2 844.4,707.8 844.4,702.91 DIP_PORT.0@842.49,701 ; v1(824.9,679.3) 825.5,678.7 844,678.7 v1(851.8,670.9)
DIP_OUT_1: Connector.34 Dip1.2 DIP_PORT.1 RA16.1 | length 324
  Top Layer w0.2: v1(707.2,640.8) 705.9,642.1 705.9,650.9 707.7,652.7 v1(707.7,653.5) ; v1(737.1,638.9) 738,639.8 743.9,639.8 v1(744.7,639) ; v1(752.4,654.3) 752.5,654.2 v1(752.5,639.8) ; v1(791.9,657.9) 794.1,657.9 794.8,657.2 794.9,657.3 v1(794.9,657.4) ; Dip1.2@826.14,691.41 826.14,685.86 827.3,684.7 v1(827.3,679.5) ; v1(851.7,672.4) 852.9,671.2 RA16.1@852.9,668.8
  Bottom Layer w0.2: v1(707.2,640.8) 709,639 711.5,639 712.7,640.2 721.8,640.2 722.3,639.7 731.1,639.7 732.5,638.3 736.5,638.3 v1(737.1,638.9) ; v1(707.7,653.5) 707.7,655.4 705.9,657.2 705.9,700.185 Connector.34@709.295,703.58 ; v1(744.7,639) 751.7,639 v1(752.5,639.8) ; v1(752.4,654.3) 752.4,655.5 753.3,656.4 758.9,656.4 759.5,655.8 769.3,655.8 772.3,658.8 790.3,658.8 791.2,657.9 v1(791.9,657.9) ; v1(794.9,657.4) 797.2,657.4 798.2,658.4 798.2,679.9 804.4,686.1 804.4,687.6 806.2,689.4 824.13,689.4 Dip1.2@826.14,691.41 820.2,697.35 820.2,706.2 822.8,708.8 837.7,708.8 841.2,705.3 841.2,702.25 DIP_PORT.1@839.95,701 ; v1(827.3,679.5) 844,679.5 851.1,672.4 v1(851.7,672.4)
DIP_OUT_2: Connector.35 Dip1.3 DIP_PORT.2 RA16.2 | length 328.5
  Top Layer w0.2: v1(705.9,653.5) 705.5,653.1 705.5,652 705,651.5 705,640.6 v1(706.2,639.4) ; v1(754.4,640.8) 754.4,654.2 v1(754.5,654.3) ; v1(792.1,656.1) 793.3,656.1 v1(795,654.4) ; Dip1.3@828.68,691.41 830,690.09 830,680.7 v1(829.5,680.2) ; v1(851.8,673.9) 853.7,672 RA16.2@853.7,668.8
  Bottom Layer w0.2: v1(705.9,653.5) 706,653.6 706,655.2 705.1,656.1 705.1,701.3 706.755,702.955 Connector.35@706.755,703.58 ; v1(706.2,639.4) 706.2,638.9 707,638.1 713.1,638.1 714.3,639.3 721.5,639.3 722,638.8 730.7,638.8 732,637.5 752.2,637.5 754.3,639.6 754.3,640.7 v1(754.4,640.8) ; v1(754.5,654.3) 754.5,654.7 755.4,655.6 758.4,655.6 759,655 769.7,655 772.7,658 789.5,658 791.4,656.1 v1(792.1,656.1) ; v1(795,654.4) 796.7,652.7 798.5,652.7 799.1,653.3 799.1,679.2 799.7,679.8 800.2,679.8 807,686.6 807,687.6 808.2,688.8 826.07,688.8 Dip1.3@828.68,691.41 820.7,699.39 820.7,706 823,708.3 836.4,708.3 838.7,706 838.7,702.29 DIP_PORT.2@837.41,701 ; v1(829.5,680.2) 829.7,680 845.7,680 v1(851.8,673.9)
DIP_OUT_3: Connector.36 Dip1.4 DIP_PORT.3 RA16.3 | length 325
  Top Layer w0.2: v1(704.2,653.6) 704.2,646.4 704.1,646.3 704.1,638.8 v1(705.1,637.8) ; v1(756.2,641) 756.2,652.5 v1(757.9,654.2) ; v1(791.9,654.4) 794.9,651.4 v1(794.9,651) ; Dip1.4@831.22,691.41 831.22,685.98 832.5,684.7 832.5,680.9 v1(832.6,680.8) ; v1(851.6,675.9) 854.5,673 RA16.3@854.5,668.8
  Bottom Layer w0.2: v1(704.2,653.6) 704.215,653.615 Connector.36@704.215,703.58 ; v1(705.1,637.8) 705.6,637.3 716,637.3 716.9,638.2 718.7,638.2 718.9,638 730.3,638 731.6,636.7 752.6,636.7 756.2,640.3 v1(756.2,641) ; v1(757.9,654.2) 770.1,654.2 773,657.1 789.2,657.1 v1(791.9,654.4) ; v1(794.9,651) 799.5,651 800.1,651.6 800.1,677.6 810.5,688 828,688 831.22,691.22 Dip1.4@831.22,691.41 821.1,701.53 821.1,705.6 823.3,707.8 834.1,707.8 836.2,705.7 836.2,702.33 DIP_PORT.3@834.87,701 ; v1(832.6,680.8) 846.7,680.8 v1(851.6,675.9)
DIP_OUT_4: Connector.29 Dip1.5 DIP_PORT.8 RA19.0 | length 297.6
  Top Layer w0.2: v1(704.8,639.5) 704.6,639.7 704.6,652.1 705,652.5 v1(705,654.7) ; v1(755.3,642.2) 755.3,653.6 v1(756,654.3) ; v1(793.1,655) 795,653.1 v1(795,652.6) ; v1(808.4,687.7) 809.6,686.5 v1(810.2,686.5) ; DIP_PORT.8@824.71,703.54 824.71,702.99 826,701.7 826,699.17 Dip1.5@833.76,691.41 840.17,685 842.5,685 847.8,679.7 RA19.0@847.8,668.8
  Bottom Layer w0.2: Connector.29@704.215,706.12 705.5,704.835 705.5,702.9 704.7,702.1 704.7,655 v1(705,654.7) ; v1(704.8,639.5) 706.6,637.7 714.4,637.7 715.5,638.8 720.7,638.8 721.1,638.4 730.5,638.4 731.8,637.1 752.4,637.1 755.3,640 v1(755.3,642.2) ; v1(756,654.3) 756.8,655.1 758.1,655.1 758.6,654.6 769.9,654.6 772.8,657.5 789.4,657.5 791.7,655.2 792.9,655.2 v1(793.1,655) ; v1(795,652.6) 796.2,651.4 799.1,651.4 799.7,652 799.5,652.2 799.5,677.9 808.4,686.8 v1(808.4,687.7) ; v1(810.2,686.5) 811.2,687.5 829.85,687.5 Dip1.5@833.76,691.41
DIP_OUT_5: Connector.30 Dip1.6 DIP_PORT.9 RA19.1 | length 294.4
  Top Layer w0.2: v1(705.9,640.9) 705.4,641.4 705.4,651.1 706.9,652.6 v1(706.9,654.6) ; v1(753.4,641.9) v1(753.4,655.2) ; v1(793.1,657) 793.8,657 v1(794.9,655.9) ; v1(805.8,686.7) 807.5,686.7 v1(809.1,685.1) ; DIP_PORT.9@827.25,703.54 827.25,703.15 828.5,701.9 828.5,699.21 Dip1.6@836.3,691.41 836.3,689.6 840.4,685.5 842.7,685.5 848.6,679.6 RA19.1@848.6,668.8
  Bottom Layer w0.2: v1(705.9,640.9) 708.3,638.5 712.2,638.5 713.5,639.8 721.6,639.8 722.2,639.2 731,639.2 732.3,637.9 751.9,637.9 753.4,639.4 v1(753.4,641.9) ; Connector.30@706.755,706.12 708,704.875 708,703.1 705.5,700.6 705.5,656.5 706.9,655.1 v1(706.9,654.6) ; v1(753.4,655.2) 754.2,656 758.6,656 759.2,655.4 769.5,655.4 772.5,658.4 790,658.4 791.3,657.1 793,657.1 v1(793.1,657) ; v1(794.9,655.9) 797.7,655.9 798.6,656.8 798.6,679.5 v1(805.8,686.7) ; v1(809.1,685.1) 810.2,685.1 812.1,687 831.89,687 Dip1.6@836.3,691.41
DIP_OUT_6: Connector.31 Dip1.7 DIP_PORT.10 RA19.2 | length 291.3
  Top Layer w0.2: v1(706.8,642.3) 706.4,642.7 706.4,650.8 708.5,652.9 v1(708.5,654.6) ; v1(735.9,639.6) 736.5,640.2 744.2,640.2 v1(744.7,640.7) ; v1(751.5,655.4) 751.6,655.3 v1(751.6,641) ; v1(793.1,658.9) 794.8,658.9 v1(794.9,658.8) ; v1(803,685.8) 806,685.8 v1(807.9,683.9) ; DIP_PORT.10@829.79,703.54 831.2,702.13 831.2,699.4 838.84,691.76 Dip1.7@838.84,691.41 838.84,689.26 842.2,685.9 843,685.9 849.4,679.5 RA19.2@849.4,668.8
  Bottom Layer w0.2: v1(706.8,642.3) 708.5,640.6 722.2,640.6 722.7,640.1 731.4,640.1 732.7,638.8 735.6,638.8 735.9,639.1 v1(735.9,639.6) ; v1(708.5,654.6) 708.5,655.7 706.4,657.8 706.4,698.8 710.5,702.9 710.5,704.915 Connector.31@709.295,706.12 ; v1(744.7,640.7) 745.9,639.5 750.1,639.5 v1(751.6,641) ; v1(751.5,655.4) 752.9,656.8 759.2,656.8 759.7,656.3 769.2,656.3 772.2,659.3 792.7,659.3 v1(793.1,658.9) ; v1(794.9,658.8) 797.3,658.8 797.8,659.3 797.8,680.3 803,685.5 v1(803,685.8) ; v1(807.9,683.9) 809.8,683.9 812.5,686.6 834.03,686.6 Dip1.7@838.84,691.41
DIP_OUT_7: Connector.32 Dip1.8 DIP_PORT.11 RA19.3 | length 293.2
  Top Layer w0.2: v1(708.7,644.6) 707.6,645.7 707.6,650.5 710.4,653.3 710.4,653.7 v1(711.2,654.5) ; v1(737.6,641.6) 742.4,641.6 744.6,643.8 744.8,643.6 v1(744.9,643.6) ; v1(749.1,654.6) 750.1,653.6 750.2,653.5 750.2,643.8 749.4,643 v1(749.4,640.9) ; v1(792.7,662) v1(794.7,662) ; v1(800,684.8) 805,684.8 v1(807,682.8) ; DIP_PORT.11@832.33,703.54 832.33,702.97 833.6,701.7 833.6,699.19 Dip1.8@841.38,691.41 841.38,687.32 842.4,686.3 843.2,686.3 850.2,679.3 RA19.3@850.2,668.8
  Bottom Layer w0.2: v1(708.7,644.6) 708.7,642.7 709.9,641.5 722.6,641.5 723.1,641 734.8,641 735.6,641.8 737.4,641.8 v1(737.6,641.6) ; v1(711.2,654.5) 711.2,654.7 707.4,658.5 707.4,696.7 713.2,702.5 713.2,704.755 Connector.32@711.835,706.12 ; 744.6,643.8 746.2,642.2 746.2,641.5 746.9,640.8 749.3,640.8 v1(749.4,640.9) ; v1@744.8,643.6 v1(744.9,643.6) ; v1(749.1,654.6) 749.1,655.2 751.5,657.6 759.9,657.6 760.4,657.1 768.8,657.1 771.8,660.1 790.8,660.1 v1(792.7,662) ; v1(794.7,662) 796.5,662 796.8,662.3 796.8,680.9 797.9,682 797.9,682.7 v1(800,684.8) ; v1(807,682.8) 809.5,682.8 812.9,686.2 836.17,686.2 Dip1.8@841.38,691.41
DP2: 2.9 RA20.3 | length 4.9
  Top Layer w0.2: RA20.3@688.5,575.8 688.5,576.2 688.9,576.6 688.9,580.12 2.9@688.62,580.4
DUT+: 3.63 ELVIS_PORT_FUNC.0 | length 55.4
  Top Layer w0.2: v1(773.1,694.5) 773.43,694.17 785.58,694.17 787.03,695.62 787.03,708.9 789.04,710.91 789.04,711.7 v1(788.14,712.6)
  Bottom Layer w0.2: v1(773.1,694.5) 774.7,692.9 774.7,684.53 ELVIS_PORT_FUNC.0@775.97,683.26 ; v1(788.14,712.6) 788.7,713.16 3.63@788.7,722.46
DUT-: 3.53 ELVIS_PORT_FUNC.2 | length 48.7
  Top Layer w0.2: v1(772.39,697.52) 775.48,697.52 777.5,699.54 777.5,707.3 778.4,708.2 779.8,708.2 787.43,715.83 3.53@787.43,722.46
  Bottom Layer w0.2: ELVIS_PORT_FUNC.2@770.89,683.26 772.18,684.55 772.18,697.31 v1(772.39,697.52)
E3: 2.10 RA21.3 | length 5.6
  Top Layer w0.2: 2.10@691.16,580.4 692.7,578.86 RA21.3@692.7,575.4
E_+5: 3.2 3.3 3.4 CT2.1 VCC_Switch.0 | length 0.2
  Top Layer w0.7: CT2.1@719.97,714.96 CT2.1@720.11,715.1
E_+15: 3.0 3.1 ELVIS_PORT_FUNC.9 R2.2 | length 144.4
  Top Layer w0.7: v1(716.4,685.7) 716.4,685.43 723.83,678 735,678 735.2,677.8 735.1,677.7 v1(735.1,677.5) ; v1(716.4,718.6) 716.4,722.3 3.0@716.3,722.4 3.1@717.57,722.4 ; v1(745.6,661.5) 745.9,661.2 R2.2@745.9,625 ; v1(746.2,677.6) 747.57,677.6 757.38,687.41 759.12,687.41 ELVIS_PORT_FUNC.9@760.73,685.8
  Bottom Layer w0.7: v1(716.4,685.7) v1(716.4,718.6) ; v1(735.1,677.5) 735.1,677.7 735.2,677.8 v1@746,677.8 ; v1(745.6,661.5) 745.6,677.4 v1@746,677.8 ; v1(746.2,677.6) v1@746,677.8
E_-15: 3.116 3.117 ELVIS_PORT_FUNC.10 | length 95.9
  Top Layer w0.7: v1(720.27,683.74) 720.29,683.74 725.13,678.9 v1(735.2,678.9) ; v1(745.6,678.9) 747,678.9 759.68,691.58 v1(761.16,691.58)
  Bottom Layer w0.7: 3.117@716.3,722.4 3.116@717.57,722.4 717.56,722.39 717.56,686.45 v1(720.27,683.74) ; v1(735.2,678.9) v1(745.6,678.9) ; v1(761.16,691.58) 763.27,689.47 ELVIS_PORT_FUNC.10@763.27,685.8
E_AM: 3.67 ELVIS_PORT_FUNC.4 | length 70.4
  Top Layer w0.2: ELVIS_PORT_FUNC.4@765.81,683.26 768.65,680.42 779.22,680.42 v1(780.2,681.4) ; v1(783.14,699.72) 783.14,710.49 v1(786.26,713.61) ; v1(787.3,688.5) 787.77,688.5 790.91,691.64 v1(790.91,696.89)
  Bottom Layer w0.2: v1(780.2,681.4) v1(787.3,688.5) ; v1(783.14,699.72) 788.4,699.72 790.88,697.24 v1@790.88,696.89 ; 3.67@783.62,722.46 783.62,716.38 786.26,713.74 v1(786.26,713.61)
E_AO0: 3.56 ELVIS_PORT_DIO_1.15 ELVIS_PORT_DIO_2.15 | length 105.6
  Top Layer w0.2: ELVIS_PORT_DIO_1.15@725.17,701.04 725.17,699.65 731.12,693.7 739,693.7 742.7,697.4 752.025,697.4 753.825,695.6 758.5,695.6 760.1,697.2 760.1,699.13 ELVIS_PORT_DIO_2.15@758.19,701.04 ; v1(769.5,694.5) 770.37,693.63 786.04,693.63 787.51,695.1 787.51,708.66 789.5,710.65 789.5,716.3 791.24,718.04 3.56@791.24,722.46 3.56@791,722.22
  Bottom Layer w0.2: v1(759.3,696.5) 759.4,696.5 761.4,694.5 v1(769.5,694.5)
E_AO1: 3.61 ELVIS_PORT_DIO_3.15 | length 99.1
  Top Layer w0.2: ELVIS_PORT_DIO_3.15@742.95,685.35 ELVIS_PORT_DIO_3.15@742.95,685.8 744.4,684.35 744.4,683.58 v1(745.14,682.84) v1@745.14,683.16 ; v1(769.54,692.31) 769.56,692.33 786.09,692.33 788.5,694.74 788.5,695.24 788.51,695.25 788.51,708.41 v1(792.81,712.71)
  Bottom Layer w0.2: v1(745.14,682.84) 753.2,690.9 754.2,690.9 757,688.1 757,682.1 757.7,681.4 763.68,681.4 764.42,682.14 764.42,690.11 766.62,692.31 v1(769.54,692.31) ; 3.61@791.24,722.46 791.24,714.28 v1(792.81,712.71)
E_BASE: 3.54 ELVIS_PORT_FUNC.1 | length 57.3
  Top Layer w0.2: ELVIS_PORT_FUNC.1@773.43,683.26 774.79,681.9 777.21,681.9 777.72,682.41 v1(777.72,683.28) ; v1(785,690.4) 789.56,694.96 v1(789.56,697.03) ; v1(785.79,697.03) 784.88,697.03 783.73,698.18 783.73,698.84 784.55,699.66 784.55,710.03 788.7,714.18 3.54@788.7,722.46
  Bottom Layer w0.2: v1(777.72,683.28) 784.84,690.4 v1(785,690.4) ; v1(785.79,697.03) v1(789.56,697.03)
E_DIO_0: 3.9 ELVIS_PORT_DIO_1.0 | length 19.9
  Top Layer w0.2: ELVIS_PORT_DIO_1.0@725.17,703.58 727.73,706.14 3.9@727.73,722.4
E_DIO_1: 3.108 ELVIS_PORT_DIO_1.8 | length 30.7
  Bottom Layer w0.2: 3.108@727.73,722.4 727.73,717.88 728.09,717.52 731.05,717.52 744.49,704.08 744.49,702.58 ELVIS_PORT_DIO_1.8@742.95,701.04
E_DIO_2: 3.8 ELVIS_PORT_DIO_1.1 | length 19.4
  Top Layer w0.2: v1(726.41,706.17) 726.46,706.22 3.8@726.46,722.4
  Bottom Layer w0.2: v1(726.41,706.17) 726.41,704.88 ELVIS_PORT_DIO_1.1@727.71,703.58
E_DIO_3: 3.109 ELVIS_PORT_DIO_1.9 | length 30
  Bottom Layer w0.2: 3.109@726.46,722.4 726.46,717.67 727.06,717.07 730.78,717.07 741.77,706.08 741.76,706.08 741.76,702.613 ELVIS_PORT_DIO_1.9@740.566,701.419
E_DIO_4: 3.7 ELVIS_PORT_DIO_1.2 | length 27.1
  Top Layer w0.2: 3.7@725.19,722.4 725.19,705.86 723.83,704.5 723.83,702.92 724.31,702.44 729.11,702.44 ELVIS_PORT_DIO_1.2@730.25,703.58
E_DIO_5: 3.110 ELVIS_PORT_DIO_1.10 | length 30.4
  Top Layer w0.2: ELVIS_PORT_DIO_1.10@737.87,701.04 739.12,702.29 v1(739.12,707.32)
  Bottom Layer w0.2: 3.110@725.19,722.4 725.19,717.17 725.8,716.56 730.5,716.56 739.12,707.94 v1(739.12,707.32)
E_DIO_6: 3.6 ELVIS_PORT_DIO_1.3 | length 25.4
  Top Layer w0.2: v1@723.92,707.6 3.6@723.92,722.4
  Bottom Layer w0.2: v1(723.88,707.62) 723.9,707.6 728.77,707.6 ELVIS_PORT_DIO_1.3@732.79,703.58
E_DIO_7: 3.111 ELVIS_PORT_DIO_1.11 | length 31.7
  Bottom Layer w0.2: 3.111@723.92,722.4 723.92,716.6 724.46,716.06 730.16,716.06 738,708.22 738,707.6 736.51,706.11 736.51,702.18 735.37,701.04 ELVIS_PORT_DIO_1.11@735.33,701.04
E_DIO_8: 3.14 ELVIS_PORT_DIO_2.0 | length 34.5
  Top Layer w0.2: 3.14@736.63,722.46 736.63,719.97 737.3,719.3 737.3,713.1 743.94,706.46 755.31,706.46 ELVIS_PORT_DIO_2.0@758.19,703.58
E_DIO_9: 3.103 ELVIS_PORT_DIO_2.8 | length 58.4
  Top Layer w0.2: v1(774.58,705.43) 774.58,703.22 775.97,701.83 ELVIS_PORT_DIO_2.8@775.97,701.04
  Bottom Layer w0.2: 3.103@736.63,722.46 736.305,722.135 736.305,719.72 735.585,719 734.5,719 734.1,718.6 734.1,717.2 739.49,711.81 754.84,711.81 755.73,712.7 767.93,712.7 774.58,706.05 v1(774.58,705.43)
E_DIO_10: 3.13 ELVIS_PORT_DIO_2.1 | length 40.2
  Top Layer w0.2: 3.13@735.36,722.46 735.36,720.24 736.9,718.7 736.9,712.9 744.66,705.14 754.88,705.14 756.56,703.46 756.54,703.44 756.54,703.12 756.52,703.14 v1(756.52,703.5)
  Bottom Layer w0.2: v1(756.52,703.5) 756.52,703.14 756.54,703.12 756.54,702.66 756.93,702.27 759.42,702.27 ELVIS_PORT_DIO_2.1@760.73,703.58
E_DIO_11: 3.104 ELVIS_PORT_DIO_2.9 | length 58
  Bottom Layer w0.2: 3.104@735.36,722.46 735.36,719.96 734.8,719.4 734.1,719.4 733.5,718.8 733.5,717.1 739.28,711.32 755.04,711.32 755.92,712.2 767.73,712.2 773.72,706.21 773.72,705.06 774.62,704.16 774.62,702.23 ELVIS_PORT_DIO_2.9@773.43,701.04
E_DIO_12: 3.12 ELVIS_PORT_DIO_2.2 | length 42.8
  Top Layer w0.2: 3.12@734.09,722.46 734.09,719.91 734.7,719.3 735.4,719.3 736.3,718.4 736.3,712.9 744.51,704.69 753.07,704.69 755.48,702.28 761.97,702.28 ELVIS_PORT_DIO_2.2@763.27,703.58
E_DIO_13: 3.105 ELVIS_PORT_DIO_2.10 | length 56.6
  Bottom Layer w0.2: 3.105@734.09,722.46 734.09,720.09 732.9,718.9 732.9,717.1 739.14,710.86 755.33,710.86 756.17,711.7 767.63,711.7 770.08,709.25 770.08,706.14 772.17,704.05 772.17,702.32 ELVIS_PORT_DIO_2.10@770.89,701.04
E_DIO_14: 3.11 ELVIS_PORT_DIO_2.3 | length 52.1
  Top Layer w0.2: 3.11@732.82,722.46 732.82,719.78 733.9,718.7 735.4,718.7 735.8,718.3 735.8,712.2 742.9,705.1 743.5,705.1 744.36,704.24 752.55,704.24 757.4,699.39 757.4,698.38 v1(757.89,697.89)
  Bottom Layer w0.2: v1(757.89,697.89) 759.69,697.89 762,700.2 762,701.63 762.53,702.16 764.39,702.16 ELVIS_PORT_DIO_2.3@765.81,703.58
E_DIO_15: 3.106 ELVIS_PORT_DIO_2.11 | length 55.5
  Bottom Layer w0.2: 3.106@732.82,722.46 732.3,721.94 732.3,717 738.92,710.38 755.53,710.38 756.45,711.3 767.15,711.3 769.66,708.79 769.66,702.35 ELVIS_PORT_DIO_2.11@768.35,701.04
E_DIO_16: 3.25 ELVIS_PORT_DIO_3.0 | length 47.7
  Top Layer w0.2: 3.25@750.6,721.1 3.25@750.6,722.46 750.5,722.36 750.5,719.7 750.8,719.4 752.3,719.4 752.72,718.98 752.72,708.9 753.44,708.18 v1(753.62,708.18)
  Bottom Layer w0.2: ELVIS_PORT_DIO_3.0@742.95,683.26 743.73,683.26 751.59,691.12 751.59,704.51 753.64,706.56 v1@753.64,708.14
E_DIO_17: 3.93 ELVIS_PORT_DIO_3.8 | length 59
  Top Layer w0.2: v1@730.6,690.15 730.6,692.1 731.4,692.9 746.6,692.9 747.2,692.3 748.73,692.3 v1(749.4,692.97) ; v1(749.2,712.7) 749.25,712.65 v1(749.25,708.78)
  Bottom Layer w0.2: ELVIS_PORT_DIO_3.8@725.17,685.8 725.17,686.58 728.74,690.15 v1@730.7,690.15 ; v1(749.2,712.7) 749.2,722.33 3.93@749.33,722.46 ; v1(749.25,708.78) 749.4,708.63 v1(749.4,692.97)
  other v1: 730.6,690.2
E_DIO_18: 3.24 ELVIS_PORT_DIO_3.1 | length 47.3
  Top Layer w0.2: 3.24@749.33,722.46 749.33,720.07 752.2,717.2 752.2,708.63 752.85,707.98 v1(752.85,707.18)
  Bottom Layer w0.2: ELVIS_PORT_DIO_3.1@740.41,683.26 741.68,684.53 744.21,684.53 751.09,691.41 751.09,705.42 v1(752.85,707.18)
E_DIO_19: 3.94 ELVIS_PORT_DIO_3.9 | length 55.9
  Top Layer w0.2: v1(730,688.7) 729.89,688.81 729.89,692.36 730.83,693.3 747.5,693.3 v1(747.82,692.98) ; v1(747.87,712.71) 747.88,712.7 v1(747.88,708.94)
  Bottom Layer w0.2: ELVIS_PORT_DIO_3.9@727.71,685.8 727.71,687 729.3,688.59 729.89,688.59 v1(730,688.7) ; v1(747.82,692.98) 747.82,694.64 747.88,694.7 v1(747.88,708.94) ; v1(747.87,712.71) 747.87,722.27 3.94@748.06,722.46
E_DIO_20: 3.23 ELVIS_PORT_DIO_3.2 | length 51.3
  Top Layer w0.2: 3.23@746.79,722.46 746.79,720.11 751.4,715.5 751.4,710.5 749.95,709.05 749.95,708.31 750.61,707.65 751.25,707.65 v1(751.5,707.4)
  Bottom Layer w0.2: ELVIS_PORT_DIO_3.2@737.87,683.26 739.03,684.42 740.87,684.42 741.79,685.34 741.79,686.39 742.6,687.2 745.83,687.2 750.65,692.02 750.65,706.55 v1(751.5,707.4)
E_DIO_21: 3.95 ELVIS_PORT_DIO_3.10 | length 53.2
  Top Layer w0.2: ELVIS_PORT_DIO_3.10@730.25,685.8 730.25,687.5 735.25,692.5 745.4,692.5 v1(746.6,691.3) ; v1(746.3,713) 746.58,712.72 746.58,709.33
  Bottom Layer w0.2: v1@746.3,712.98 v1(746.3,713) 746.3,721.97 3.95@746.79,722.46 ; v1(746.58,709.7) 746.58,709.04 747.48,708.14 747.48,695.76 746.62,694.9 746.62,691.75 746.6,691.73 v1(746.6,691.3)
E_DIO_22: 3.22 ELVIS_PORT_DIO_3.3 | length 52.3
  Top Layer w0.2: 3.22@748.06,722.46 748.06,719.94 751.8,716.2 751.8,709.61 v1@750.95,708.76
  Bottom Layer w0.2: ELVIS_PORT_DIO_3.3@735.33,683.26 736.62,684.55 738.45,684.55 739.09,685.19 739.09,687.99 740.15,689.05 746.9,689.05 750.23,692.38 750.23,707.82 v1@750.89,708.48
  other v1: 750.92,708.76
E_DIO_23: 3.96 ELVIS_PORT_DIO_3.11 | length 52.2
  Top Layer w0.2: ELVIS_PORT_DIO_3.11@732.79,685.8 732.79,688.39 736.5,692.1 744.6,692.1 745,691.7 v1(745,690) ; v1(744.9,713.13) 744.9,711.15 745.55,710.5 v1(745.55,708.64)
  Bottom Layer w0.2: ELVIS_PORT_DIO_3.11@732.79,685.8 ELVIS_PORT_DIO_3.11@732.79,685.93 ; v1(744.9,713.13) 744.9,714.4 745.52,715.02 3.96@745.52,722.46 ; v1(745,690) 745.15,690.15 745.15,694.12 746.28,695.25 746.28,707.93 746.2,708.01 746.18,708.01 v1(745.55,708.64)
E_FM: 3.68 ELVIS_PORT_FUNC.3 | length 50.2
  Top Layer w0.2: v1(770.91,697.55) 771.75,698.39 775.33,698.39 777.09,700.15 777.09,707.49 778.28,708.68 779.59,708.68 779.59,708.72 784.38,713.51 784.38,714.51 v1(784.3,714.59)
  Bottom Layer w0.2: ELVIS_PORT_FUNC.3@768.35,683.26 769.5,684.41 769.5,686.21 770.8,687.51 770.8,693.4 770.5,693.7 770.5,695.1 770.91,695.51 v1(770.91,697.55) 770.6,697.24 ; 3.68@782.35,722.46 782.35,716.54 v1(784.3,714.59)